# Altium PCB Tone_Stack_V2.PcbDoc
Units mil, origin at the board's own origin, x right, y up, seen from the top; angles counter-clockwise.
Board outline 1250 x 1000 mil, 4 copper layers (Top Layer, Ground Plane, Power Plane, Bottom Layer), stack 25.9 mil thick; 28 components, 37 nets, 134 pads, 90 vias.
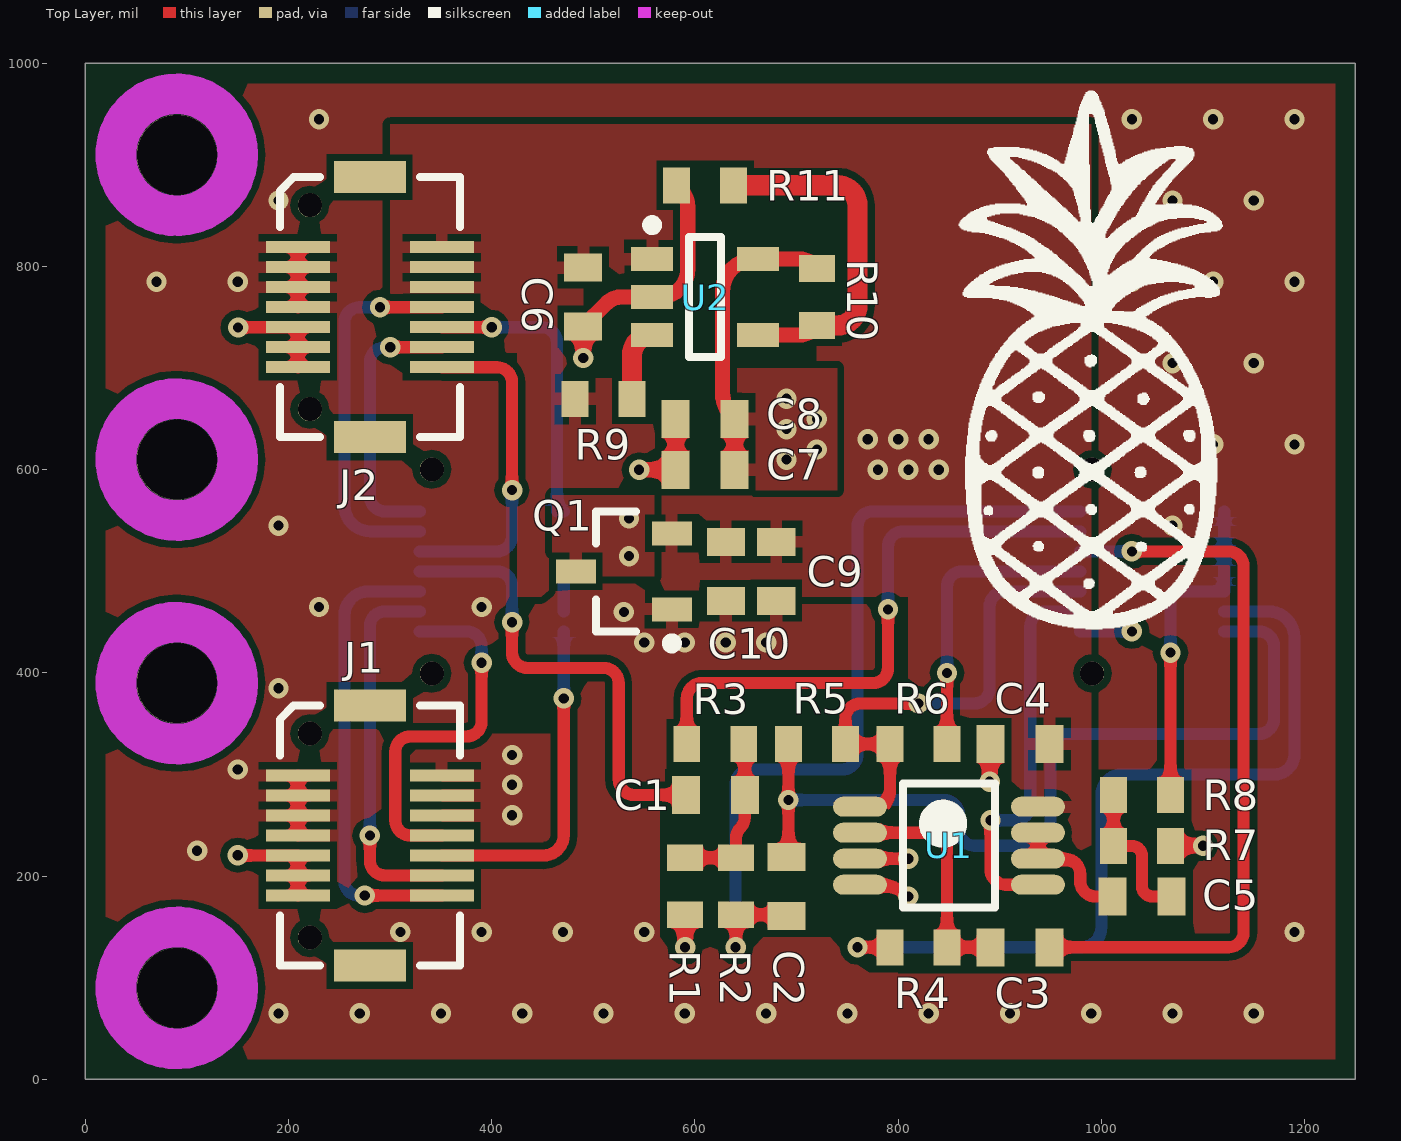
[diagram p0: Top Layer view]
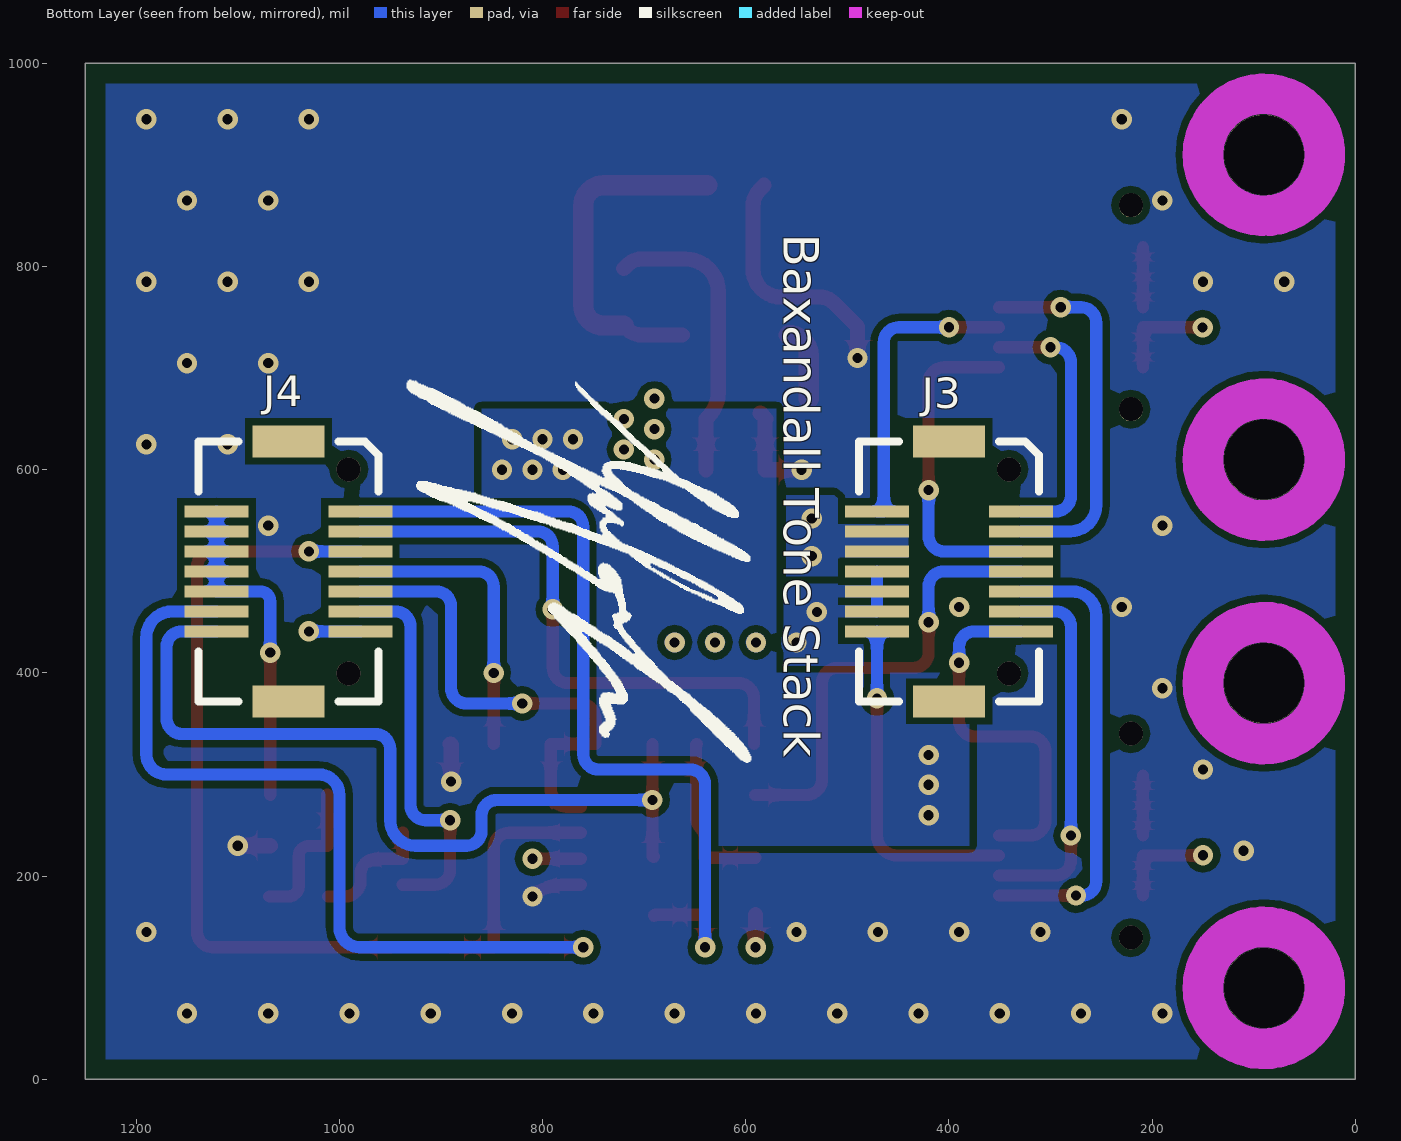
[diagram p1: Bottom Layer view, seen from below]
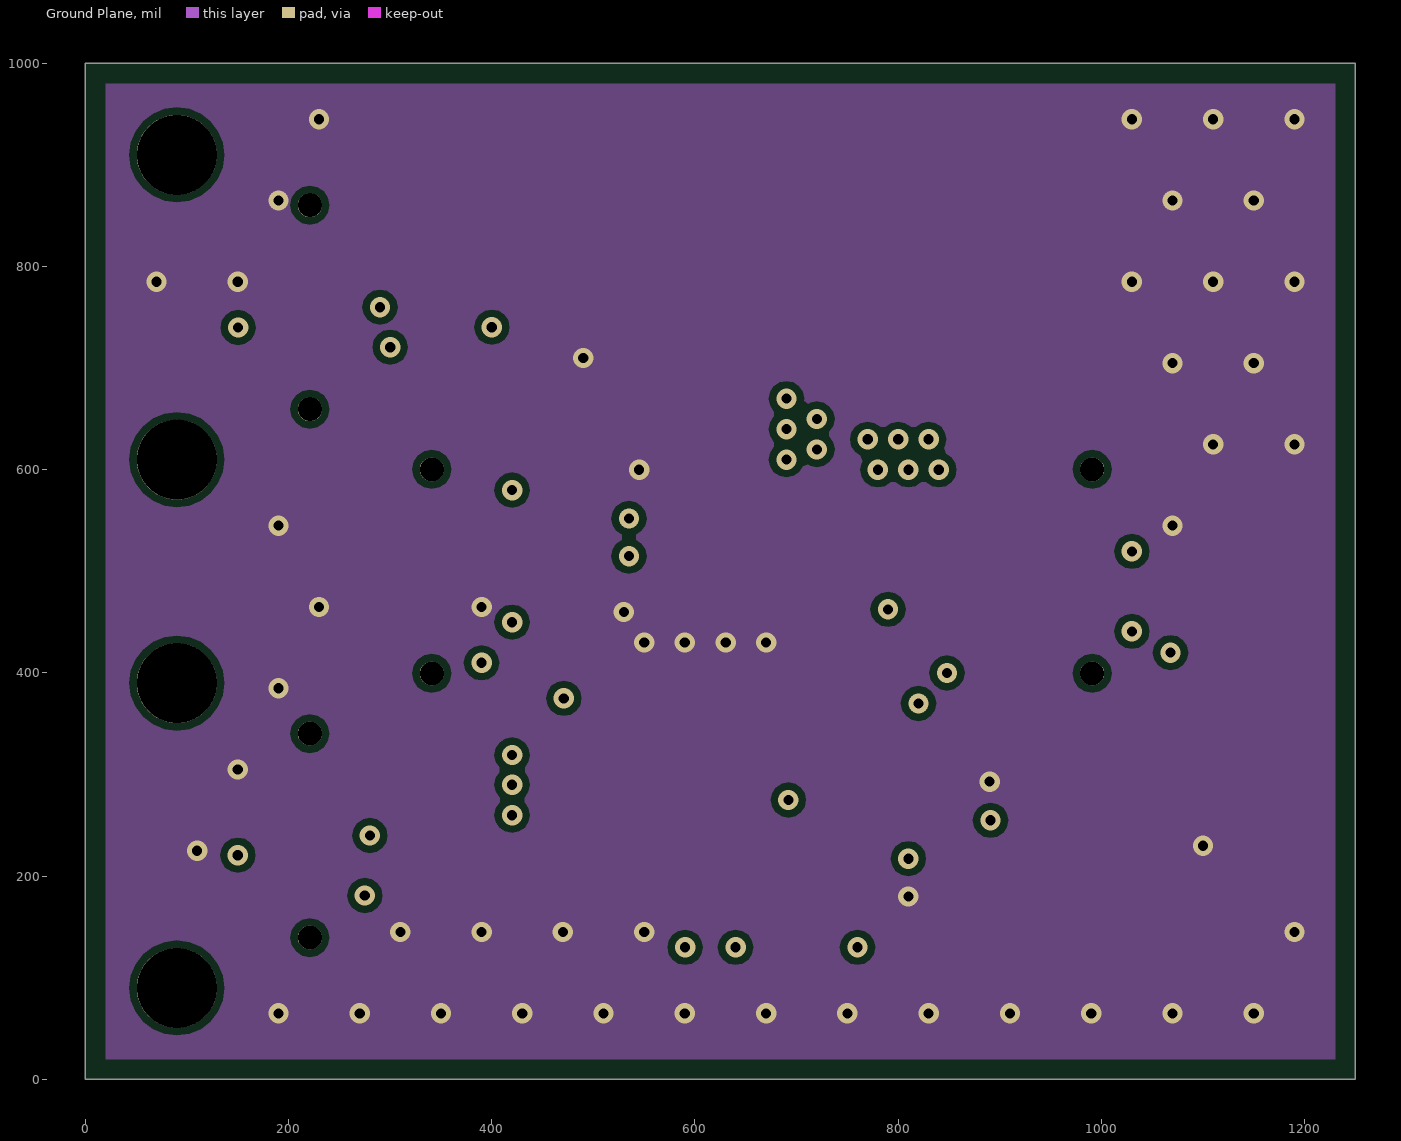
[diagram p2: Ground Plane]
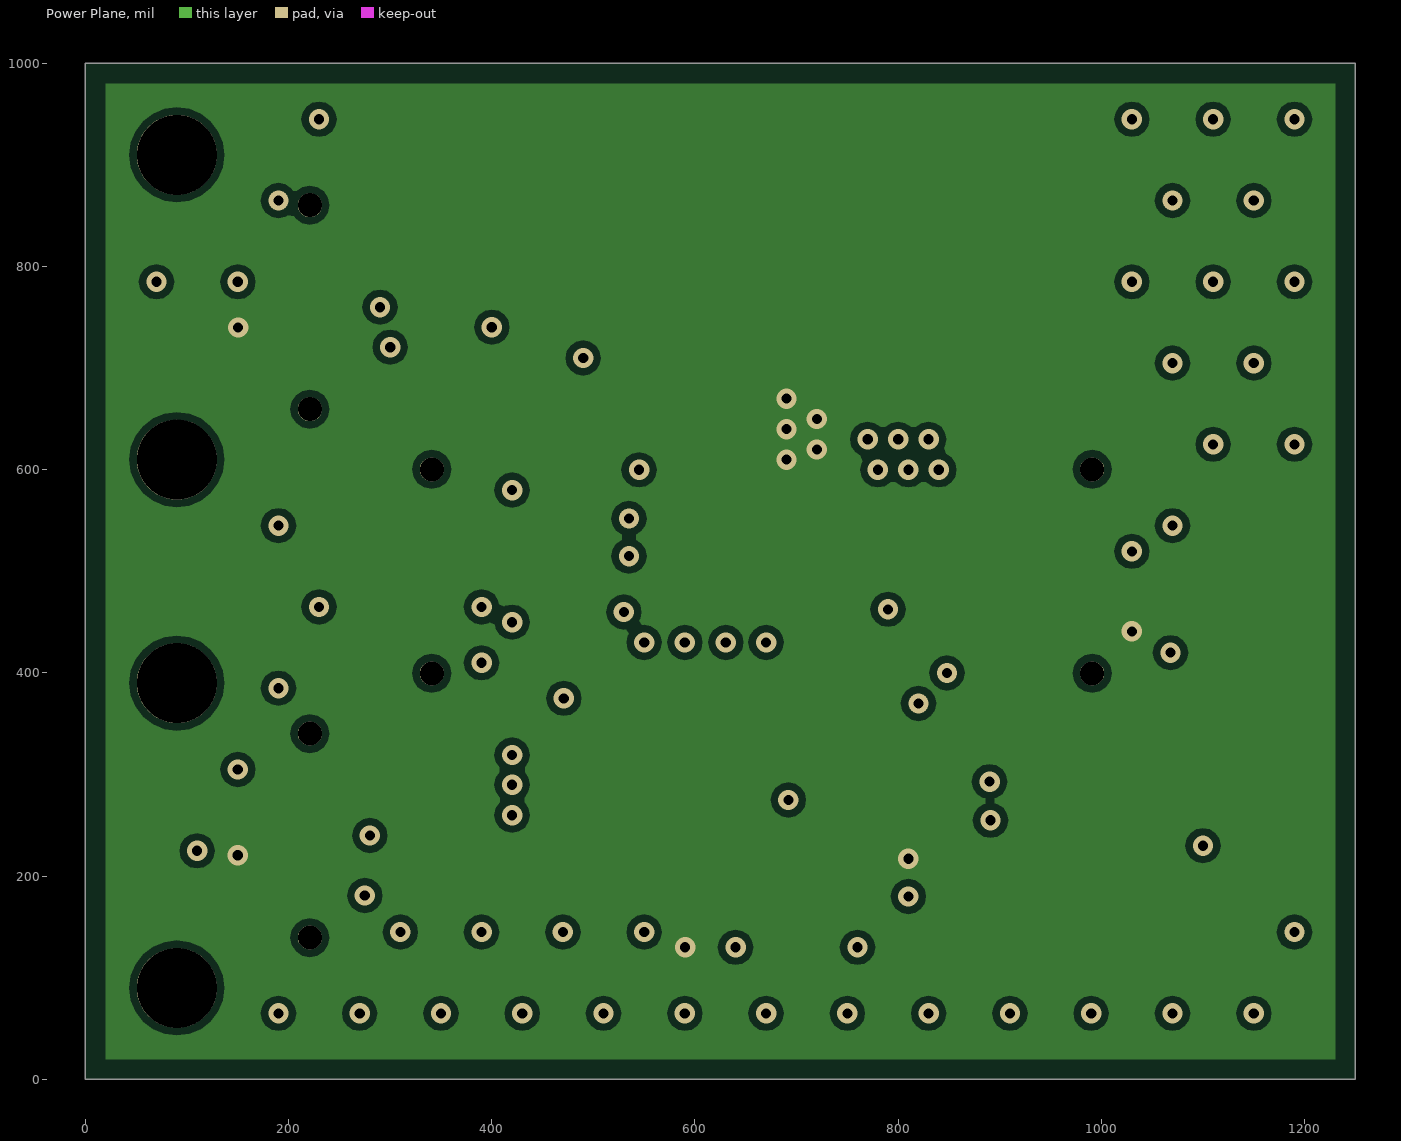
[diagram p3: Power Plane]
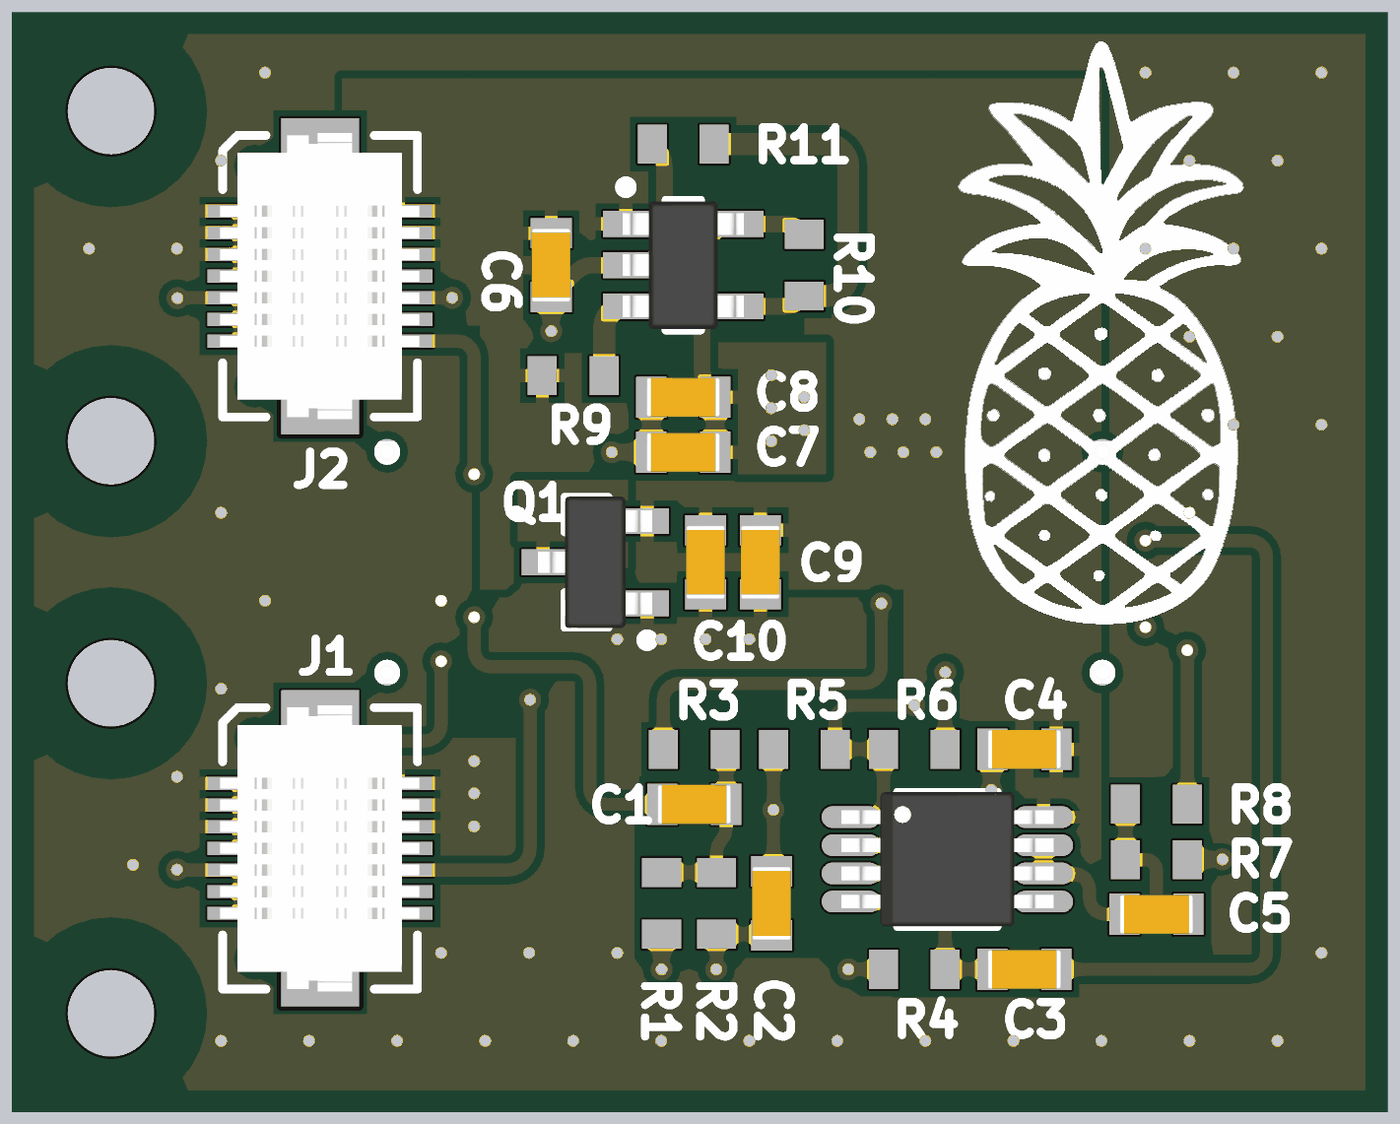
[diagram p4: 3D render of the assembled board from above, using the file's embedded part models]

## Layer stack, top to bottom
Top Solder: solder mask 1, Solder Resist, Dk 3.5
Top Layer: signal copper 1.4
Dielectric 1: core 6.7, FR-4, Dk 4.2
Ground Plane: signal copper 0.7
Dielectric 3: prepreg 5, Dk 4.2
Power Plane: signal copper 0.7
Dielectric 2: core 10, Dk 4.2
Bottom Layer: signal copper 1.4
Bottom Solder: solder mask 1, Solder Resist, Dk 3.5

## Board outline
0,0 1250,0 1250,1000 0,1000

## Design rules (kind name [scope] priority, off if disabled: settings)
Clearance "Small Polygon Clearance" [InNamedPolygon('VBAT_BOT') Or InNamedPolygon('GND_BOT')] p1: gap=10 ignorepadtopadclearanceinfootprint=FALSE except(0: Arc-Hole Track-Hole SMDPad-Hole THPad-Hole Via-Hole Fill-Hole Poly-Hole Region-Hole Text-Hole; 7: Arc-Fill Arc-Poly Arc-Region Track-Fill Track-Poly Track-Region SMDPad-Fill SMDPad-Poly SMDPad-Region THPad-Fill THPad-Poly THPad-Region Via-Fill Via-Poly Via-Region Fill-Fill Fill-Poly Fill-Region Poly-Poly Poly-Region Region-Region)
Clearance [All] p2: gap=7 ignorepadtopadclearanceinfootprint=FALSE except(0: Arc-Text Arc-Hole Track-Text Track-Hole SMDPad-Text SMDPad-Hole THPad-Text THPad-Hole Via-Text Via-Hole Fill-Text Fill-Hole Poly-Text Poly-Hole Region-Text Region-Hole Text-Hole; 5: Arc-Arc Arc-Track Arc-SMDPad Arc-THPad Arc-Via Track-Track Track-SMDPad Track-THPad Track-Via SMDPad-SMDPad)
MinimumSolderMaskSliver [All] p1: minsoldermaskwidth=5
PlaneClearance [All] p1: clearance=10
PlaneConnect [All] p1: pad.planeconnectstyle=Relief pad.reliefexpansion=10 pad.reliefentries=4 pad.reliefconductorwidth=12 pad.reliefairgap=10 via.planeconnectstyle=Direct via.reliefexpansion=20 via.reliefentries=4 via.reliefconductorwidth=10 via.reliefairgap=10
PolygonConnect "GND_PS_TOP Connect" [All vs IsNamedPolygon('GND_PS_TOP')] p1: connectstyle=Direct reliefconductorwidth=10 reliefentries=4 polygonreliefangle="90 Angle" airgapwidth=10
PolygonConnect "Small Polygon Connect" [All vs IsNamedPolygon('VBAT_BOT') or IsNamedPolygon('GND_BOT') or  InNamedPolygon('V+_TOP_PINS')] p2: connectstyle=Direct reliefconductorwidth=10 reliefentries=4 polygonreliefangle="90 Angle" airgapwidth=10
PolygonConnect [All] p3: thpad.connectstyle=Relief thpad.reliefconductorwidth=12 thpad.reliefentries=4 thpad.polygonreliefangle="90 Angle" thpad.airgapwidth=10 smdpad.connectstyle=Relief smdpad.reliefconductorwidth=12 smdpad.reliefentries=4 smdpad.polygonreliefangle="90 Angle" smdpad.airgapwidth=7 via.connectstyle=Direct via.reliefconductorwidth=12 via.reliefentries=4 via.polygonreliefangle="90 Angle" via.airgapwidth=10
PolygonConnect "Mezzanine Polygon Connect" [HasFootprint('DF12(3.0)-14DP') or HasFootprint('DF12(3.0)-14DS') vs Not ( InNamedPolygon('GND_BOTTOM') or InNamedPolygon('GND_TOP') )] p4: connectstyle=Direct reliefconductorwidth=10 reliefentries=4 polygonreliefangle="90 Angle" airgapwidth=10
RoutingCorners [All] p1: cornerstyle=Round minsetback=40 maxsetback=40
RoutingVias [All] p1: holewidth=10 width=20 viastyle="Through Hole" minholewidth=10 minwidth=20 maxholewidth=20 maxwidth=40
SolderMaskExpansion [All] p1: expansion=2
Width [All] p1: maxlimit=50 minlimit=7 preferedwidth=10
26 further rules are at their usual default settings.

## Classes and differential pairs
component class Designator: C1 C2 C3 C4 C5 C6 C7 C8 C9 C10 C? Q1 R1 R2 R3 R4 R5 R6 R7 R8 R9 R10 R11 U1 U2
component class Designator: J1 J2 J3 J4

## Components (designator, comment, footprint, x,y, rotation, side; value= is the part's Value field where it differs from the comment)
C1 "1uF" CAPC1608X09N 620,280 r0 top
C2 "12nf" CAPC1608X09N 690.32,190 r90 top
C3 "4700pF" CAPC1608X09N 920,130 r180 top
C4 "0.1uF" CAPC1608X09N 920,330 r0 top
C5 "1uF" CAPC1608X09N 1040,180.08 r0 top
C6 "1uF" CAPC1608X09N 490,770 r90 top
C7 "1uF" CAPC1608X09N 610,600 r0 top
C8 "0.1uF" CAPC1608X09N 610,650 r0 top
C9 "0.1uF" CAPC1608X09N 680,500 r90 top
C10 "1uF" CAPC1608X09N 630.32,500 r90 top
J1 "CONN HEADER 14POS" DF12(3.0)-14DP 280,240 r90 top
J2 "CONN HEADER 14POS" DF12(3.0)-14DP 280,760 r90 top
J3 "CONN RECEPT 14POS" DF12(3.0)-14DS 400,500 r270 bottom
J4 "CONN RCPT 14POS SMD GOLD" DF12(3.0)-14DS 1050,500 r270 bottom
Q1 "SI2399DS-T1-GE3" SOT95P237X112-3N 530,500 r180 top
R1 "47K" RESC1608X06N 590.32,190 r90 top
R2 "20K" RESC1608X06N 640.32,190 r270 top
R3 "10k" RESC1608X06N 620,330 r180 top
R4 "20K" RESC1608X06N 820,130 r180 top
R5 "20K" RESC1608X06N 720,330 r0 top
R6 "10k" RESC1608X06N 820,330 r180 top
R7 "47K" RESC1608X06N 1040,229.76 r180 top
R8 "10k" RESC1608X06N 1040,280.08 r0 top
R9 "10k" RESC1608X06N 510,669.61 r0 top
R10 "20K" RESC1608X06N 720,770 r90 top
R11 "20K" RESC1608X06N 610,880 r180 top
U1 "OPA2170AIDGKR" TSOP65P490X110-8N 850,230 r0 top
U2 "IC REG LIN POS ADJ 200MA SOT23-5" SOT95P280X145-5N 610,770 r0 top

## Footprints (in the part's own frame and the unit in brackets; to place one, negate y for a bottom-side part, rotate by r counter-clockwise, add the part's x,y. Pads: shape width x height; smd on the part's side, far side on the other; paste and mask are expansions set on the pad)
CAPC1608X09N [mm] "Chip Capacitor, 2-Leads, Body 1.60x0.80mm, IPC Medium Density"
  rect 0.7x0.95 smd: 1(-0.738,0) 2(0.738,0)
  body extent -0.85,-0.45 0.85,0.45, height 0.8
DF12(3.0)-14DP [mm] "CONN HEADER 14POS 3MM SMD 0.5MM"
  rect 0.3x1.6 smd mask+0.051: 1(1.5,1.8) 2(1,1.8) 3(0.5,1.8) 4(0,1.8) 5(-0.5,1.8) 6(-1,1.8) 7(-1.5,1.8) 8(-1.5,-1.8) 9(-1,-1.8) 10(-0.5,-1.8) 11(0,-1.8) 12(0.5,-1.8) 13(1,-1.8) 14(1.5,-1.8)
  rect 0.8x1.8 smd mask+0.102: ""(-3.25,0)
  round 0.6 hole 0.6 unplated mask+0: ""(-2.55,1.5) ""(2.55,1.5)
  rect 0.8x1.8 smd: ""(3.25,0)
  Multi-Layer region: -4,1
  silkscreen extent -3.25,-2.25 3.25,2.25, body extent -3.3,-2.29 3.3,2.31, height 2.29
DF12(3.0)-14DS [mm] "CONN RECEPT 14POS 3MM SMD 0.5MM"
  rect 0.3x1.6 smd mask+0.051: 1(-1.5,1.8) 2(-1,1.8) 3(-0.5,1.8) 4(0,1.8) 5(0.5,1.8) 6(1,1.8) 7(1.5,1.8) 8(1.5,-1.8) 9(1,-1.8) 10(0.5,-1.8) 11(0,-1.8) 12(-0.5,-1.8) 13(-1,-1.8) 14(-1.5,-1.8)
  rect 0.8x1.8 smd mask+0.102: ""(-3.25,0)
  round 0.6 hole 0.6 unplated mask+0: ""(-2.55,1.5) ""(2.55,1.5)
  rect 0.8x1.8 smd: ""(3.25,0)
  Multi-Layer region: -4,1
  silkscreen extent -3.25,-2.25 3.25,2.25, body extent -3.3,-2.3 3.3,2.3, height 2.19
RESC1608X06N [mm] "Chip Resistor, 2-Leads, Body 1.60x0.80mm, IPC Medium Density"
  rect 0.67x0.9 smd: 1(-0.713,0) 2(0.713,0)
  body extent -0.85,-0.45 0.85,0.45, height 0.55
SOT95P237X112-3N [mm] "SOT23, 3-Leads, Body 2.92x2.37mm, Pitch 0.95mm, IPC Medium Density"
  rect 1x0.6 smd: 1(-1.2,0.95) 2(-1.2,-0.95) 3(1.2,0)
  silkscreen extent -1.33,-1.5 0.7,1.92, body extent -1.32,-1.52 1.32,1.52, height 1.12
SOT95P280X145-5N [mm] "SOT23, 5-Leads, Body 2.95x2.80mm, Pitch 0.95mm, IPC Medium Density"
  rect 1.05x0.6 smd: 1(-1.325,0.95) 2(-1.325,0) 3(-1.325,-0.95) 4(1.325,-0.95) 5(1.325,0.95)
  silkscreen extent -1.45,-1.5 0.4,1.92, body extent -1.4,-1.48 1.4,1.48, height 1.45
TSOP65P490X110-8N [mm] "TSOP, 8-Leads, Body 3.00x3.00mm, Pitch 0.65mm, IPC Medium Density"
  oval 1.35x0.5 smd: 1(-2.225,0.975) 2(-2.225,0.325) 3(-2.225,-0.325) 4(-2.225,-0.975) 5(2.225,-0.975) 6(2.225,-0.325) 7(2.225,0.325) 8(2.225,0.975)
  silkscreen extent -1.15,-1.55 1.15,1.55, body extent -2.45,-1.55 2.45,1.55, height 1.1

## Part data
C1 C5 C6 C7 C10: library part "CAP CER 1uF 0603", Digikey Part Number=490-10487-1-ND, Manufacturer=Murata, Manufacturer Part Number=GRM188R7YA105KA12D, Rating=X7R, Tolerance=10%, Voltage=35V
C2: library part "CAP CER 0.012UF 25V C0G/NP0 0603", "0.012µF ±5% 25V Ceramic Capacitor C0G, NP0 0603 (1608 Metric)", Digikey Part Number=399-20390-1-ND, Manufacturer=Kemet, Rating=C0G/NP0, Tolerance=5%, Voltage=25V
C3: library part "CAP CER 4700pF 0603", Digikey Part Number=445-172684-1-ND, Manufacturer=TDK, Rating=C0G, Tolerance=5%, Voltage=100V
C4 C8 C9: library part "CAP CER 0.1uF 0603", Digikey Part Number=490-1519-1-ND, Package=0603, Rating=X7R, Tolerance=10%, Voltage=50V
J1 J2: library part DF12(3.0)-14DP-0.5V(86), "14 Position Connector Header, Outer Shroud Contacts Surface Mount Gold", Digikey Part Number=H11701CT-ND, Manufacturer=Hirose
J3: library part DF12(3.0)-14DS-0.5V(86), "14 Position Connector Receptacle, Center Strip Contacts Surface Mount Gold", Digikey Part Number=H11702CT-ND, Manufacturer=Hirose
J4: library part DF12(3.0)-14DS-0.5V(86)-COMPOSITE, "14 Position Connector Header, Outer Shroud Contacts Surface Mount Gold", Digikey Part Number=H11702CT-ND, Manufacturer=Hirose
Q1: library part MOSFET_P_CH_20V_6A_SOT23-3, "Reverse Voltage MOSFET", Digikey Part Number=SI2399DS-T1-GE3CT-ND, Manufacturer="Vishay Siliconix", Rds On (Max)="34 mOhm @ 5.1A, 10V", VDS=20V
R1 R7: library part "RES 47K 0603", "RES 47K 0603", Digikey Part Number=311-47.0KHRCT-ND, Tolerance=1%, Type=RES
R2 R4 R5 R10 R11: library part "RES 20K 0603", Digikey Part Number=311-20.0KHRCT-ND, Power=0.1W, Tolerance=1%
R3 R6 R9: library part "RES SMD 10K OHM 1% 1/10W 0603", "RES SMD 10K OHM 1% 1/10W 0603", Digikey Part Number=311-10.0KHRCT-ND, Manufacturer=Yageo, Manufacturer Part Number=RC0603FR-0710KL, Power=0.1W, Temperature=155dC, Tolerance=1%, Type=RES
R8: library part "RES 10K 0603", "RES 10K 0603", Digikey Part Number=311-10.0KHRCT-ND, Manufacturer=Yageo, Manufacturer Part Number=RC0603FR-0710KL, Power=0.1W, Temperature=155dC, Tolerance=1%, Type=RES
U1: "General Purpose Amplifier 2 Circuit Rail-to-Rail 8-VSSOP", Manufacturer="Texas Instruments", Amplifier="Low Power"
U2: library part LDK320AM-R, "Linear Voltage Regulator IC 1 Output 200mA SOT-23-5", Current - Output=200mA, Current - Quiescent (Iq)=90µA, Digikey Part Number=497-16672-1-ND, Manufacturer=STMicroelectronics, Voltage - Input (Max)=18V, Voltage Dropout (Max)="0.35V @ 200mA"

## Free pads (board coordinates)
  round 78.74 hole 78.74 unplated: ""(90,90) ""(90,390) ""(90,610) ""(90,910)

## Via types
v1: diameter 20, hole 10, Top Layer to Bottom Layer, tented both sides, 90 vias

## Nets (pads, with @x,y where several pads share a name; then routed paths per layer and width w, separated by ;. In a path a pad name is that pad's centre, name@x,y a point inside that pad or via, vN(x,y) a via of type N, cw(c..) or ccw(c..) an arc to the next point about the centre after c; other vN are vias at no path point)
BASS_A: 
BASS_B: 
BASS_W: 
BRDG_PUP_OUT: J2.10 J3.14 | length 294.8
  Top Layer w12: J2.10 v1(400,740.32)
  Bottom Layer w12: v1(400,740.32) 449.23,740.32 cw(c449.23,725.32) 464.23,725.32 464.23,559.06 J3.14
BRDG_SW_IN1: J2.9 J3.1 | length 268.7
  Top Layer w12: v1(300,720.63) J2.9
  Bottom Layer w12: v1(300,720.63) 295,720.63 ccw(c295,705.63) 280,705.63 280,574.06 ccw(c295,574.06) 295,559.06 J3.1
BRDG_SW_IN2: J2.8 J3.3 | length 328.4
  Top Layer w12: J2.8 405,700.94 cw(c405,685.94) 420,685.94 v1(420,580)
  Bottom Layer w12: J3.3 405,519.69 ccw(c405,534.69) 420,534.69 v1(420,580)
BRDG_SW_OUT: J2.11 J3.2 | length 373.2
  Top Layer w12: v1(290,760) J2.11
  Bottom Layer w12: v1(290,760) 270,760 ccw(c270,745) 255,745 255,565 ccw(c280.63,565) 280.63,539.37 J3.2
GND: C4.1 C6.1 C7.1 C8.1 C9.1 C10.1 J1.1 J1.2 J1.3 J1.4 J2.1 J2.2 J2.3 J2.4 J3.9 J3.10 J3.11 Q1.1 R7.1 R11.2 U1.4 U2.2 | length 621.3
  Top Layer w12: J1.4 J1.3 209.13,279.13 cw(c210,279.13) J1.2@210,280 ; J1.2 J1.1 ; J2.4 J2.3 J2.2 J2.1 ; U1.4 781.96,191.61 cw(c781.96,151.96) v1(810,180)
  Top Layer w15: v1(490,710) C6.1 513.18,764.14 cw(c527.32,750) 527.32,770 U2.2 565.29,770 ccw(c565.29,797.72) 593,797.72 593,858.59 ccw(c568,858.59) 585.68,876.27 R11.2 ; v1(545,600) C7.1 C8.1 ; C8.1@580,650 C8.1@585.68,655.68 ; v1(810,180) v1@810,181.61 ; v1(890,293.06) 890,329.04 cw(c890.96,329.04) C4.1 ; R7.1 1068.05,230 v1(1100,230)
  Bottom Layer w12: J3.9 J3.10 J3.11
  other v1: 190,65 270,65 350,65 430,65 510,65 590,65 670,65 750,65 830,65 910,65 990,65 1070,65 1150,65 310,145 390,145 470,145 550,145 1190,145 110,225 150,305 190,385 550.01,430 590.01,430 630.32,430 670.01,430 530,460 230,465 390,465 190,545 1070,545 1110,625 1190,625 1070,705 1150,705 70,785 150,785 1030,785 1110,785 1190,785 190,865 1070,865 1150,865 230,945 1030,945 1110,945 1190,945
NECK_PUP_OUT: J1.10 J3.8 | length 332
  Top Layer w12: J1.10 450.87,220.32 ccw(c450.87,240.32) 470.87,240.32 v1(470.87,375)
  Bottom Layer w12: v1(470.87,375) J3.8
NECK_SW_IN1: J1.9 J3.6 | length 367.1
  Top Layer w12: v1(280,240) 280,215.63 ccw(c295,215.63) 295,200.63 J1.9
  Bottom Layer w12: v1(280,240) 280,445.63 cw(c295,445.63) 295,460.63 J3.6
NECK_SW_IN2: J1.8 J3.5 | length 453.1
  Top Layer w12: v1(275,180.94) J1.8
  Bottom Layer w12: v1(275,180.94) 269.06,180.94 cw(c269.06,195) 255,195 255,456.44 cw(c278.87,456.44) 278.87,480.32 J3.5
NECK_SW_OUT: J1.11 J3.7 | length 366.9
  Top Layer w12: J1.11 320,240 cw(c320,255) 305,255 305,322.5 cw(c320,322.5) 320,337.5 375,337.5 ccw(c375,352.5) 390,352.5 v1(390,410)
  Bottom Layer w12: J3.7 375,440.94 cw(c375,425.94) 390,425.94 v1(390,410)
NetC1_2: C1.2 R1.2 R2.1 R3.1 | length 164.8
  Top Layer w12: R1.2 R2.1 640.32,236.99 cw(c655.09,236.99) 644.64,247.44 ccw(c634.04,258.05) 649.04,258.05 C1.2 649.04,329.02 ccw(c648.05,329.02) R3.1
NetC2_1: C2.1 J4.1 R2.2 | length 831.7
  Top Layer w12: v1(640,130) 640.32,130 R2.2 689.33,161.95 cw(c689.33,160.96) C2.1
  Bottom Layer w12: v1(640,130) 640,290.06 cw(c655,290.06) 655,305.06 745,305.06 ccw(c745,320.06) 760,320.06 760,544.06 cw(c775,544.06) 775,559.06 J4.1
NetC2_2: C2.2 J4.8 R5.1 | length 852.1
  Top Layer w12: C2.2 ccw(c690.32,220.67) 691.95,220.67 v1(691.95,275) R5.1
  Bottom Layer w12: v1(691.95,275) 845,275 cw(c845,260) 860,260 860,245 ccw(c875,245) 875,230 925,230 ccw(c925,255) 950,255 950,325 cw(c965,325) 965,340 1155,340 ccw(c1155,355) 1170,355 1170,425.94 ccw(c1155,425.94) 1155,440.94 J4.8
NetC3_1: C3.1 J4.3 | length 728.6
  Top Layer w12: C3.1 1125,130 ccw(c1125,145) 1140,145 1140,504.69 ccw(c1125,504.69) 1125,519.69 v1(1030,519.69)
  Bottom Layer w12: J4.3 v1(1030,519.69)
NetC3_2: C3.2 R4.1 U1.2 | length 234.9
  Top Layer w12: U1.2 833.05,242.8 cw(c833.05,227.8) 848.05,227.8 R4.1 C3.2
NetC5_1: C5.1 U1.6 U1.7 | length 123.2
  Top Layer w12: U1.7 U1.6 964.12,217.2 cw(c964.12,202.2) 979.12,202.2 979.12,195.08 ccw(c994.12,195.08) 994.12,180.08 C5.1
NetC5_2: C5.2 R7.2 R8.1 | length 148.5
  Top Layer w12: R8.1 R7.2 1030,229.76 cw(c1030,219.76) 1040,219.76 1040,190.08 ccw(c1050,190.08) 1050,180.08 C5.2
NetJ4_2: J4.2 R3.2 | length 577.2
  Top Layer w12: R3.2 591.95,375 cw(c606.95,375) 606.95,390 775,390 ccw(c775,405) 790,405 v1(790,462.6)
  Bottom Layer w12: v1(790,462.6) 790,524.37 cw(c805,524.37) 805,539.37 J4.2
NetJ4_4: J4.4 R6.1 | length 294.6
  Top Layer w12: R6.1 v1(848.05,400)
  Bottom Layer w12: v1(848.05,400) 848.05,485 cw(c863.05,485) 863.05,500 J4.4
NetJ4_5: J4.5 R5.2 R6.2 U1.1 | length 490.5
  Top Layer w12: U1.1 776.44,268.39 ccw(c776.44,283.9) 791.95,283.9 R6.2 R5.2 748.05,355 cw(c763.05,355) 763.05,370 v1(820,370)
  Bottom Layer w12: v1(820,370) 875,370 ccw(c875,385) 890,385 890,465.32 cw(c905,465.32) 905,480.32 J4.5
NetJ4_6: J4.6 U1.5 | length 384.5
  Top Layer w12: v1(890.96,255) 890.96,206.61 ccw(c905.96,206.61) 905.96,191.61 U1.5
  Bottom Layer w12: v1(890.96,255) 915,255 ccw(c915,270) 930,270 930,445.63 cw(c945,445.63) 945,460.63 J4.6
NetJ4_9: J4.9 R4.2 | length 825
  Top Layer w12: v1(760,130) R4.2
  Bottom Layer w12: v1(760,130) 980,130 ccw(c980,150) 1000,150 1000,280 cw(c1020,280) 1020,300 1170,300 ccw(c1170,320) 1190,320 1190,434.98 ccw(c1164.35,434.98) 1164.35,460.63 J4.9
NetR9_2: R9.2 U2.3 | length 167.5
  Top Layer w20: R9.2 538.05,712.82 ; 538.05,712.82 cw(c557.83,712.82) U2.3 ; 538.05,712.82 cw(c557.83,712.82) U2.3 ; 538.05,712.82 cw(c557.83,712.82) U2.3 ; 538.05,712.82 cw(c557.83,712.82) U2.3
NetR10_1: R10.1 R11.1 U2.4 | length 343.7
  Top Layer w15: U2.4 702.37,732.6 ccw(c702.37,752.6) 716.51,738.46 R10.1
  Top Layer w20: R11.1 740,880 cw(c740,860) 760,860 760,761.95 cw(c740,761.95) 740,741.95 R10.1
PUP_SEL_OUT: C1.1 J3.4 | length 456.1
  Top Layer w12: v1(420,450) 420,420 ccw(c435,420) 435,405 510,405 cw(c510,390) 525,390 525,295 ccw(c540,295) 540,280 C1.1
  Bottom Layer w12: J3.4 405,500 cw(c405,485) 420,485 v1(420,450)
TREB_A: 
TREB_B: 
TREB_W: 
TS_OUT: J4.10 J4.11 J4.12 J4.13 J4.14 R8.2 | length 327.5
  Top Layer w12: R8.2 v1(1068.05,420)
  Bottom Layer w12: v1(1068.05,420) 1068.05,470.32 cw(c1078.05,470.32) 1078.05,480.32 J4.10 J4.11 J4.12 J4.13 J4.14
V+: C4.2 C6.2 C9.2 C10.2 J1.12 J1.13 J1.14 J2.12 J2.13 J2.14 Q1.2 R9.1 U1.8 U2.1
  other v1: 420,260 420,290 420,319.25 780,600 810,600 840,600 770,630 800,630 830,630
VBAT: J3.12 J3.13 Q1.3
  other v1: 535,515 535,552
VOL_A: 
VOL_B: 
VOL_W: 
VREF: C7.2 C8.2 J1.5 J1.6 J1.7 J2.5 J2.6 J2.7 J4.7 R1.1 R10.2 U1.3 U2.5 | length 620.3
  Top Layer w12: v1(150,220.67) 150.35,220.32 J1.5 J1.6 J1.7 ; v1(150.35,740) 150.67,740.32 J2.5 J2.6 J2.7 ; U1.3 v1(810,217.2)
  Top Layer w15: v1(590.32,130) R1.1 ; C7.2 C8.2 637.25,651.79 cw(c662,676.54) 627,676.54 627,775 cw(c659.4,775) 659.4,807.4 U2.5 702.37,807.4 cw(c702.37,787.4) 716.51,801.54 R10.2
  Bottom Layer w12: J4.7 v1(1030,440.94)
  other v1: 690,610 720,620 690,640 720,650 690,670
pads on no net: J1. J2. J3. J4.

## Polygon pours and split planes (outlines as drawn)
GND on Bottom Layer "GND_BOTTOM" (solid, remove dead copper, pour order 38): 20,980 1230,980 1230,20 20,20
V+ on Bottom Layer "V+_BOTTOM_ROUTE" (solid, remove dead copper, pour order 36): 570,660 860,660 860,230 510,230 380,230 380,400 570,400
VBAT on Bottom Layer "VBAT_BOT" (solid, remove dead copper, pour order 2): 560,575 560,495 507.86,495 507.86,514 439,514 439,575
GND on Top Layer "GND_TOP" (solid, remove dead copper, pour order 40): 20,980 1230,980 1230,20 20,20
V+ on Top Layer "V+_TOP_LDO" (solid, remove dead copper, pour order 22): 990,940 300,940 300,715 425,715 425,475 710,475 810,475 810,200 990,200
VREF on Top Layer "VREF_TOP_LDO" (solid, pour order 20): 615,700 740,700 740,580 615,580
VBAT on Top Layer "VBAT_TOP" (solid, pour order 8): 560,575 560,495 459.49,495 459.49,575
V+ on Top Layer "V+_TOP_NECK" (solid, pour order 34): 320,340.39 468,340.39 468,229.76 320,229.76
GND on Ground Plane "GND_PLANE" (solid, pour order 42): 20,980 1230,980 1230,20 20,20
VREF on Power Plane "POWER_PLANE" (solid, pour order 44): 20,980 1230,980 1230,20 20,20

## Keep-outs
Top Layer:
  circle w40: c90,910 r60
  circle w40: c90,90 r60
  circle w40: c90,610 r60
  circle w40: c90,390 r60
Bottom Layer:
  circle w40: c90,910 r60
  circle w40: c90,610 r60
  circle w40: c90,390 r60
  circle w40: c90,90 r60

## Other copper
Top Layer:
  pour cut-out: 1032.14,304.79 1047.86,304.79 1047.86,250 1032.14,250
  pour cut-out: 911.76,269.54 928.26,269.54 928.26,104.3 800,104.3 800,352.54 911.76,352.54
  pour cut-out: 565.6,238.24 565.6,270 610,270 610,379.75 790,379.75 790,229.76 830,229.76 830,140.18 565.6,140.18
  pour cut-out: 600.06,904.72 658.24,904.72 658.24,897.33 712.38,897.33 760,849.71 760,820 720,780 720,700.72 620,704.32 620,688.33 620,680 620,660 620,574.3 601.74,574.3 574.96,601.08 574.96,648.83 560,690 550.56,690 490,690 490,779.69 600.06,779.69
  pour cut-out: 490,779.69
Bottom Layer:
  pour cut-out: 360,570 440,570 440,430 360,430

## Silkscreen, mask and mechanical layers (free items; w line width, h text height)
Top Overlay:
  drawing of 15 lines, arcs and shapes, not listed
Bottom Overlay:
  region: 3803 vertices and 1 holes, not listed, extent 594.56,311.49 933.88,688.51
  text "Baxandall Tone Stack" at 562.5,832.39 h35 r90
Outline:
  the board outline again, w10
Mechanical 13:
  circle w10: c90,390 r51.38
  circle w10: c90,90 r51.38
  circle w2: c90,390 r80
  circle w2: c90,90 r80
  circle w10: c90,910 r51.38
  circle w10: c90,610 r51.38
  circle w2: c90,910 r80
  circle w2: c90,610 r80
  lines w10: 0,1000 0,520 1250,520 1250,1000 ; 0,0 1250,0 1250,480 0,480 0,0